# EAGLE board CheetahBoosterMCU (EAGLE 7.6.0)
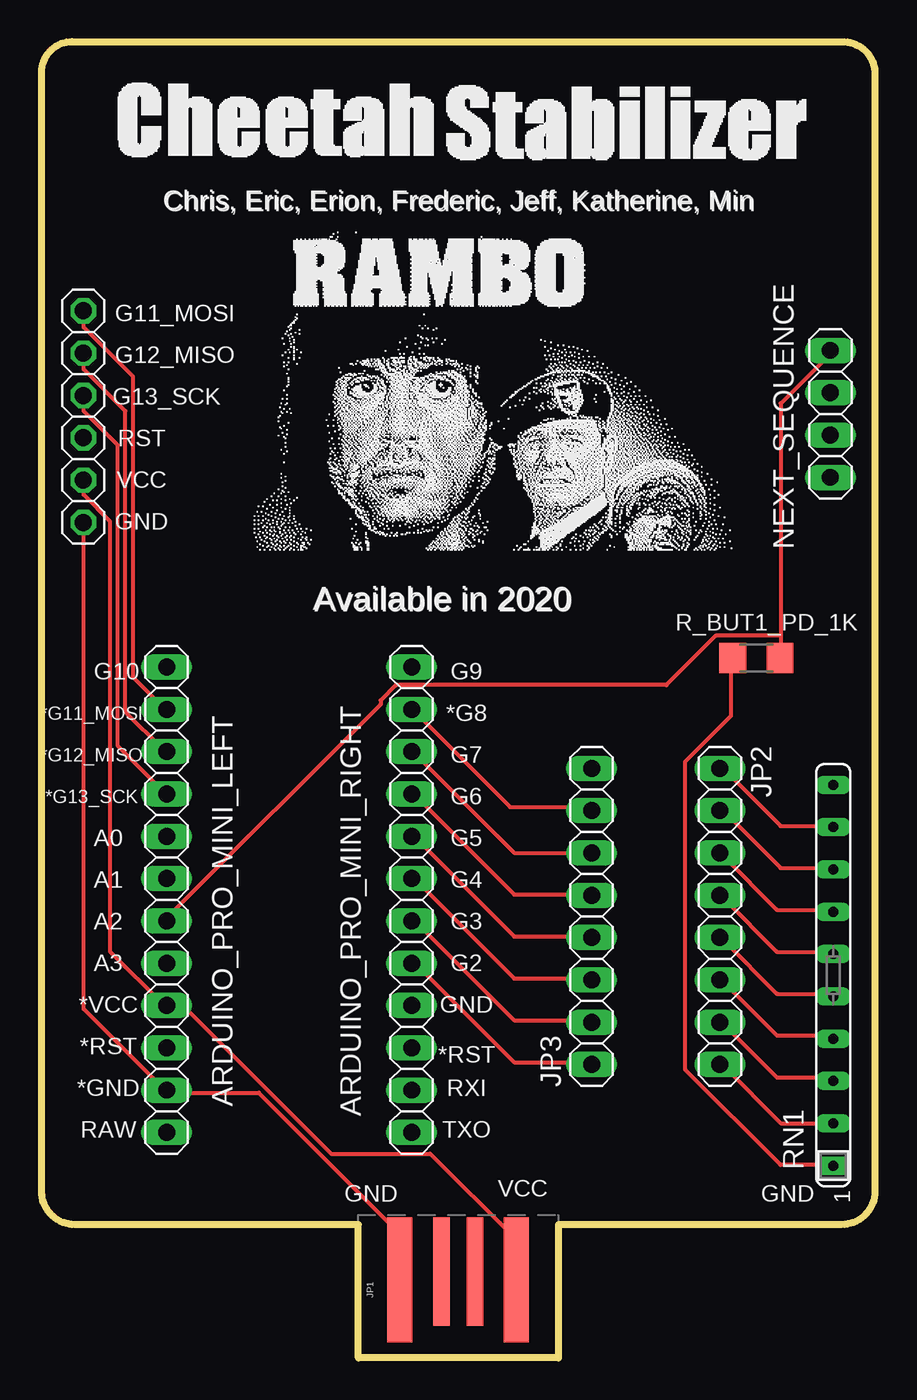
[diagram p0: board, top side]
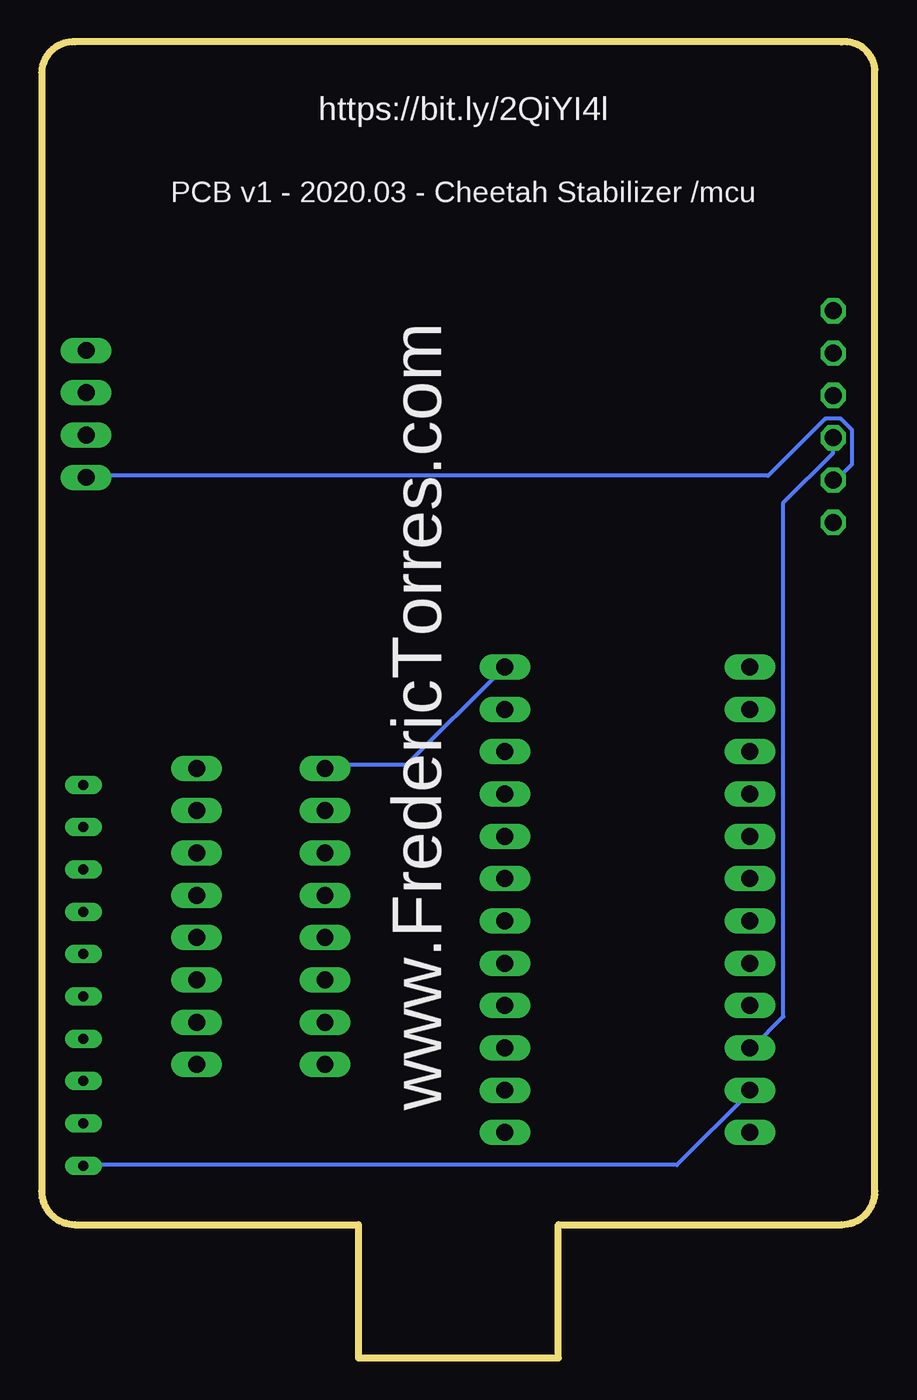
[diagram p1: board, bottom side, seen from below]

Size 50 x 79.01 mm. Coordinates in mm from the lower left corner, seen from the top.
Outline: 31,8 31,0 19,0 19,8 2,8 arc-90 0,10 0,77.34 arc-90 2,79 48,79 arc-90 50,77.17 50,10 arc-90 48,8 31,8
Copper layers (1*16): Top 0.035mm / dielectric 1.5mm / Bottom 0.035mm
Design rules "default": minimum track width 10mil, minimum drill 24mil, track to track 8mil, track to pad 8mil, pad to pad 8mil, via to via 8mil, smd to smd 8mil, copper to edge 40mil, drill to drill 8mil, minimum pad ring 10mil, minimum via ring 8mil, stop-mask expansion 4mil, vias tented up to drill 0mil, thermal gap 10mil

## Footprints (pad centres in the part's own frame; a part is rotated, then mirrored left to right if it is on the bottom)
1X12 = drill 1.016 long: 1 -13.97,0; 2 -11.43,0; 3 -8.89,0; 4 -6.35,0; 5 -3.81,0; 6 -1.27,0; 7 1.27,0; 8 3.81,0; 9 6.35,0; 10 8.89,0; 11 11.43,0; 12 13.97,0
USB-A-PCB = smd 7.5 x 1.5: 5V -0.2,-3.5; GND -0.2,3.5 | smd 6.5 x 1: USB_M 0.3,-1; USB_P 0.3,1
1X08 = drill 1.016 long: 1 -8.89,0; 2 -6.35,0; 3 -3.81,0; 4 -1.27,0; 5 1.27,0; 6 3.81,0; 7 6.35,0; 8 8.89,0
1X06 = drill 1.016 octagon: 1 -6.35,0; 2 -3.81,0; 3 -1.27,0; 4 1.27,0; 5 3.81,0; 6 6.35,0
1X04 = drill 1.016 long: 1 -3.81,0; 2 -1.27,0; 3 1.27,0; 4 3.81,0
R1206 = smd 1.6 x 1.803: 1 -1.422,0; 2 1.422,0
SIP10 = drill 0.6 long: 1 -11.46,0; 2 -8.92,0; 3 -6.38,0; 4 -3.84,0; 5 -1.3,0; 6 1.24,0; 7 3.78,0; 8 6.32,0; 9 8.86,0; 10 11.4,0

## Placement (x,y rotation side)
ARDUINO_PRO_MINI_LEFT  [1X12]  7.5,27.5 270 top
ARDUINO_PRO_MINI_RIGHT  [1X12]  22.2,27.5 270 top
JP1  USBPCB  [USB-A-PCB]  24.99,4.88 90 top
JP2  [1X08]  40.7,26.5 270 top
JP3  [1X08]  33,26.5 90 top
JP_PROGRAMMING  [1X06]  2.5,56.5 90 top
NEXT_SEQUENCE  [1X04]  47.33,56.66 90 top
R_BUT1_PD_1K  [R1206]  42.89,42 0 top
RN1  [SIP10]  47.5,23 90 top

## Library data of the parts
ARDUINO_PRO_MINI_LEFT ARDUINO_PRO_MINI_RIGHT JP_PROGRAMMING R_BUT1_PD_1K = adafruit
JP1 = SparkFun-Connectors
JP2 JP3 NEXT_SEQUENCE = pinhead
RN1 = resistor-sip

## Nets
A0: ARDUINO_PRO_MINI_LEFT.5
A1: ARDUINO_PRO_MINI_LEFT.6
A2: ARDUINO_PRO_MINI_LEFT.7 NEXT_SEQUENCE.4 R_BUT1_PD_1K.2
A3: ARDUINO_PRO_MINI_LEFT.8
DOT_NOT_USE: RN1.10
G2: ARDUINO_PRO_MINI_RIGHT.8 JP3.1
G3: ARDUINO_PRO_MINI_RIGHT.7 JP3.2
G4: ARDUINO_PRO_MINI_RIGHT.6 JP3.3
G5: ARDUINO_PRO_MINI_RIGHT.5 JP3.4
G6: ARDUINO_PRO_MINI_RIGHT.4 JP3.5
G7: ARDUINO_PRO_MINI_RIGHT.3 JP3.6
G8: ARDUINO_PRO_MINI_RIGHT.2 JP3.7
G9: ARDUINO_PRO_MINI_RIGHT.1 JP3.8
G10: ARDUINO_PRO_MINI_LEFT.1
G11_MOSI: ARDUINO_PRO_MINI_LEFT.2 JP_PROGRAMMING.6
G12_MISO: ARDUINO_PRO_MINI_LEFT.3 JP_PROGRAMMING.5
G13_SCK: ARDUINO_PRO_MINI_LEFT.4 JP_PROGRAMMING.4
GND: ARDUINO_PRO_MINI_LEFT.11 JP1.GND JP_PROGRAMMING.1 R_BUT1_PD_1K.1 RN1.1
GND2: ARDUINO_PRO_MINI_RIGHT.9
R0: JP2.1 RN1.9
R1: JP2.2 RN1.8
R2: JP2.3 RN1.7
R3: JP2.4 RN1.6
R4: JP2.5 RN1.5
R5: JP2.6 RN1.4
R6: JP2.7 RN1.3
R7: JP2.8 RN1.2
RAW: ARDUINO_PRO_MINI_LEFT.12
RST: ARDUINO_PRO_MINI_LEFT.10 JP_PROGRAMMING.3
RST_2: ARDUINO_PRO_MINI_RIGHT.10
RXI: ARDUINO_PRO_MINI_RIGHT.11
TXO: ARDUINO_PRO_MINI_RIGHT.12
VCC: ARDUINO_PRO_MINI_LEFT.9 JP1.5V JP_PROGRAMMING.2 NEXT_SEQUENCE.1

## Tracks (layer width: path | path; a pad name or v marks a point on that pad's centre or on a via)
A2
  Top 0.254: 44.35,43.35 44.35,57.29 47.32,60.27 NEXT_SEQUENCE.4 | 44.35,43.35 44.35,42.2 R_BUT1_PD_1K.2 | 44.35,43.35 40.46,43.35 37.49,40.38 21.26,40.38 20.34,39.46 20.34,39.23 7.54,26.43 ARDUINO_PRO_MINI_LEFT.7
G2
  Top 0.254: JP3.1 32.92,17.75 28.35,17.75 22.4,23.69 ARDUINO_PRO_MINI_RIGHT.8
G3
  Top 0.254: JP3.2 32.92,20.26 28.35,20.26 22.4,26.2 ARDUINO_PRO_MINI_RIGHT.7
G4
  Top 0.254: JP3.3 32.92,22.77 28.35,22.77 22.4,28.72 ARDUINO_PRO_MINI_RIGHT.6
G5
  Top 0.254: JP3.4 32.92,25.29 28.35,25.29 22.4,31.23 ARDUINO_PRO_MINI_RIGHT.5
G6
  Top 0.254: JP3.5 32.92,27.8 28.35,27.8 22.4,33.75 ARDUINO_PRO_MINI_RIGHT.4
G7
  Top 0.254: JP3.6 32.92,30.32 28.35,30.32 22.4,36.26 ARDUINO_PRO_MINI_RIGHT.3
G8
  Top 0.254: JP3.7 32.92,33.06 28.12,33.06 22.4,38.78 ARDUINO_PRO_MINI_RIGHT.2
G9
  Bottom 0.254: JP3.8 32.92,35.58 28.12,35.58 22.4,41.29 ARDUINO_PRO_MINI_RIGHT.1
G11_MOSI
  Top 0.254: JP_PROGRAMMING.6 2.52,62.78 2.52,61.87 5.49,58.89 5.49,40.83 7.32,39.01 ARDUINO_PRO_MINI_LEFT.2
G12_MISO
  Top 0.254: JP_PROGRAMMING.5 2.52,60.27 2.52,59.35 5.03,56.84 5.03,38.78 7.32,36.49 ARDUINO_PRO_MINI_LEFT.3
G13_SCK
  Top 0.254: JP_PROGRAMMING.4 2.52,57.75 2.52,56.84 4.57,54.78 4.57,36.72 7.32,33.98 ARDUINO_PRO_MINI_LEFT.4
GND
  Top 0.254: R_BUT1_PD_1K.1 41.38,41.98 41.38,38.55 38.63,35.8 38.63,17.29 44.35,11.57 47.32,11.57 RN1.1 | JP_PROGRAMMING.1 2.52,49.98 2.52,20.95 7.32,16.14 ARDUINO_PRO_MINI_LEFT.11 7.54,15.92 13.03,15.92 21.49,7.46 21.49,4.71 JP1.GND
  Bottom 0.254: RN1.1 47.32,11.57 11.89,11.57 7.54,15.92 ARDUINO_PRO_MINI_LEFT.11
R0
  Top 0.254: RN1.9 47.32,31.92 44.35,31.92 40.92,35.35 JP2.1
R1
  Top 0.254: RN1.8 47.32,29.4 44.35,29.4 40.92,32.83 JP2.2
R2
  Top 0.254: RN1.7 47.32,26.89 44.12,26.89 40.92,30.09 JP2.3
R3
  Top 0.254: RN1.6 47.32,24.38 44.12,24.38 40.92,27.57 JP2.4
R4
  Top 0.254: RN1.5 47.32,21.86 44.12,21.86 40.92,25.06 JP2.5
R5
  Top 0.254: RN1.4 47.32,19.34 44.12,19.34 40.92,22.55 JP2.6
R6
  Top 0.254: RN1.3 47.32,16.83 44.12,16.83 40.92,20.03 JP2.7
R7
  Top 0.254: RN1.2 47.32,14.09 44.35,14.09 40.92,17.52 JP2.8
RST
  Bottom 0.254: JP_PROGRAMMING.3 2.52,55.01 2.52,54.32 5.49,51.35 5.49,20.49 7.32,18.66 ARDUINO_PRO_MINI_LEFT.10
VCC
  Top 0.254: JP_PROGRAMMING.2 2.52,52.49 2.52,51.81 4.12,50.21 4.12,24.38 7.32,21.17 ARDUINO_PRO_MINI_LEFT.9 7.54,20.95 8.69,20.95 17.37,12.26 23.32,12.26 28.35,7.23 28.35,4.71 JP1.5V
  Bottom 0.254: NEXT_SEQUENCE.1 47.32,52.95 6.4,52.95 2.97,56.38 2.06,56.38 1.37,55.69 1.37,53.63 2.29,52.72 JP_PROGRAMMING.2

## Text on the board
tNames: Chris, Eric, Erion, Frederic, Jeff, Katherine, Min | Chris, Eric, Erion, Frederic, Jeff, Katherine, Min | G11_MOSI | G12_MISO | G13_SCK | RST | VCC | GND | Available in 2020 | Available in 2020 | G10 | G9 | *G11_MOSI | *G8 | *G12_MISO | G7 | *G13_SCK | G6 | A0 | G5 | A1 | G4 | A2 | G3 | A3 | G2 | *VCC | GND | *RST | *RST | *GND | RXI | RAW | TXO | GND | VCC | GND
bNames: https://bit.ly/2QiYI4l | PCB v1 - 2020.03 - Cheetah Stabilizer /mcu | www.FredericTorres.com